# Altium PCB PMM_MSPC_22A.PcbDoc (part 2 of 5)
Units mm, origin at the board's own origin, x right, y up, seen from the top; angles counter-clockwise.
Board outline 86.91 x 61.9 mm, 4 copper layers (Top Layer, GroundPlane, MidLayer1, Bottom Layer); 159 components, 129 nets, 534 pads, 221 vias.
Unrouted connection lines stored in the file: 36.
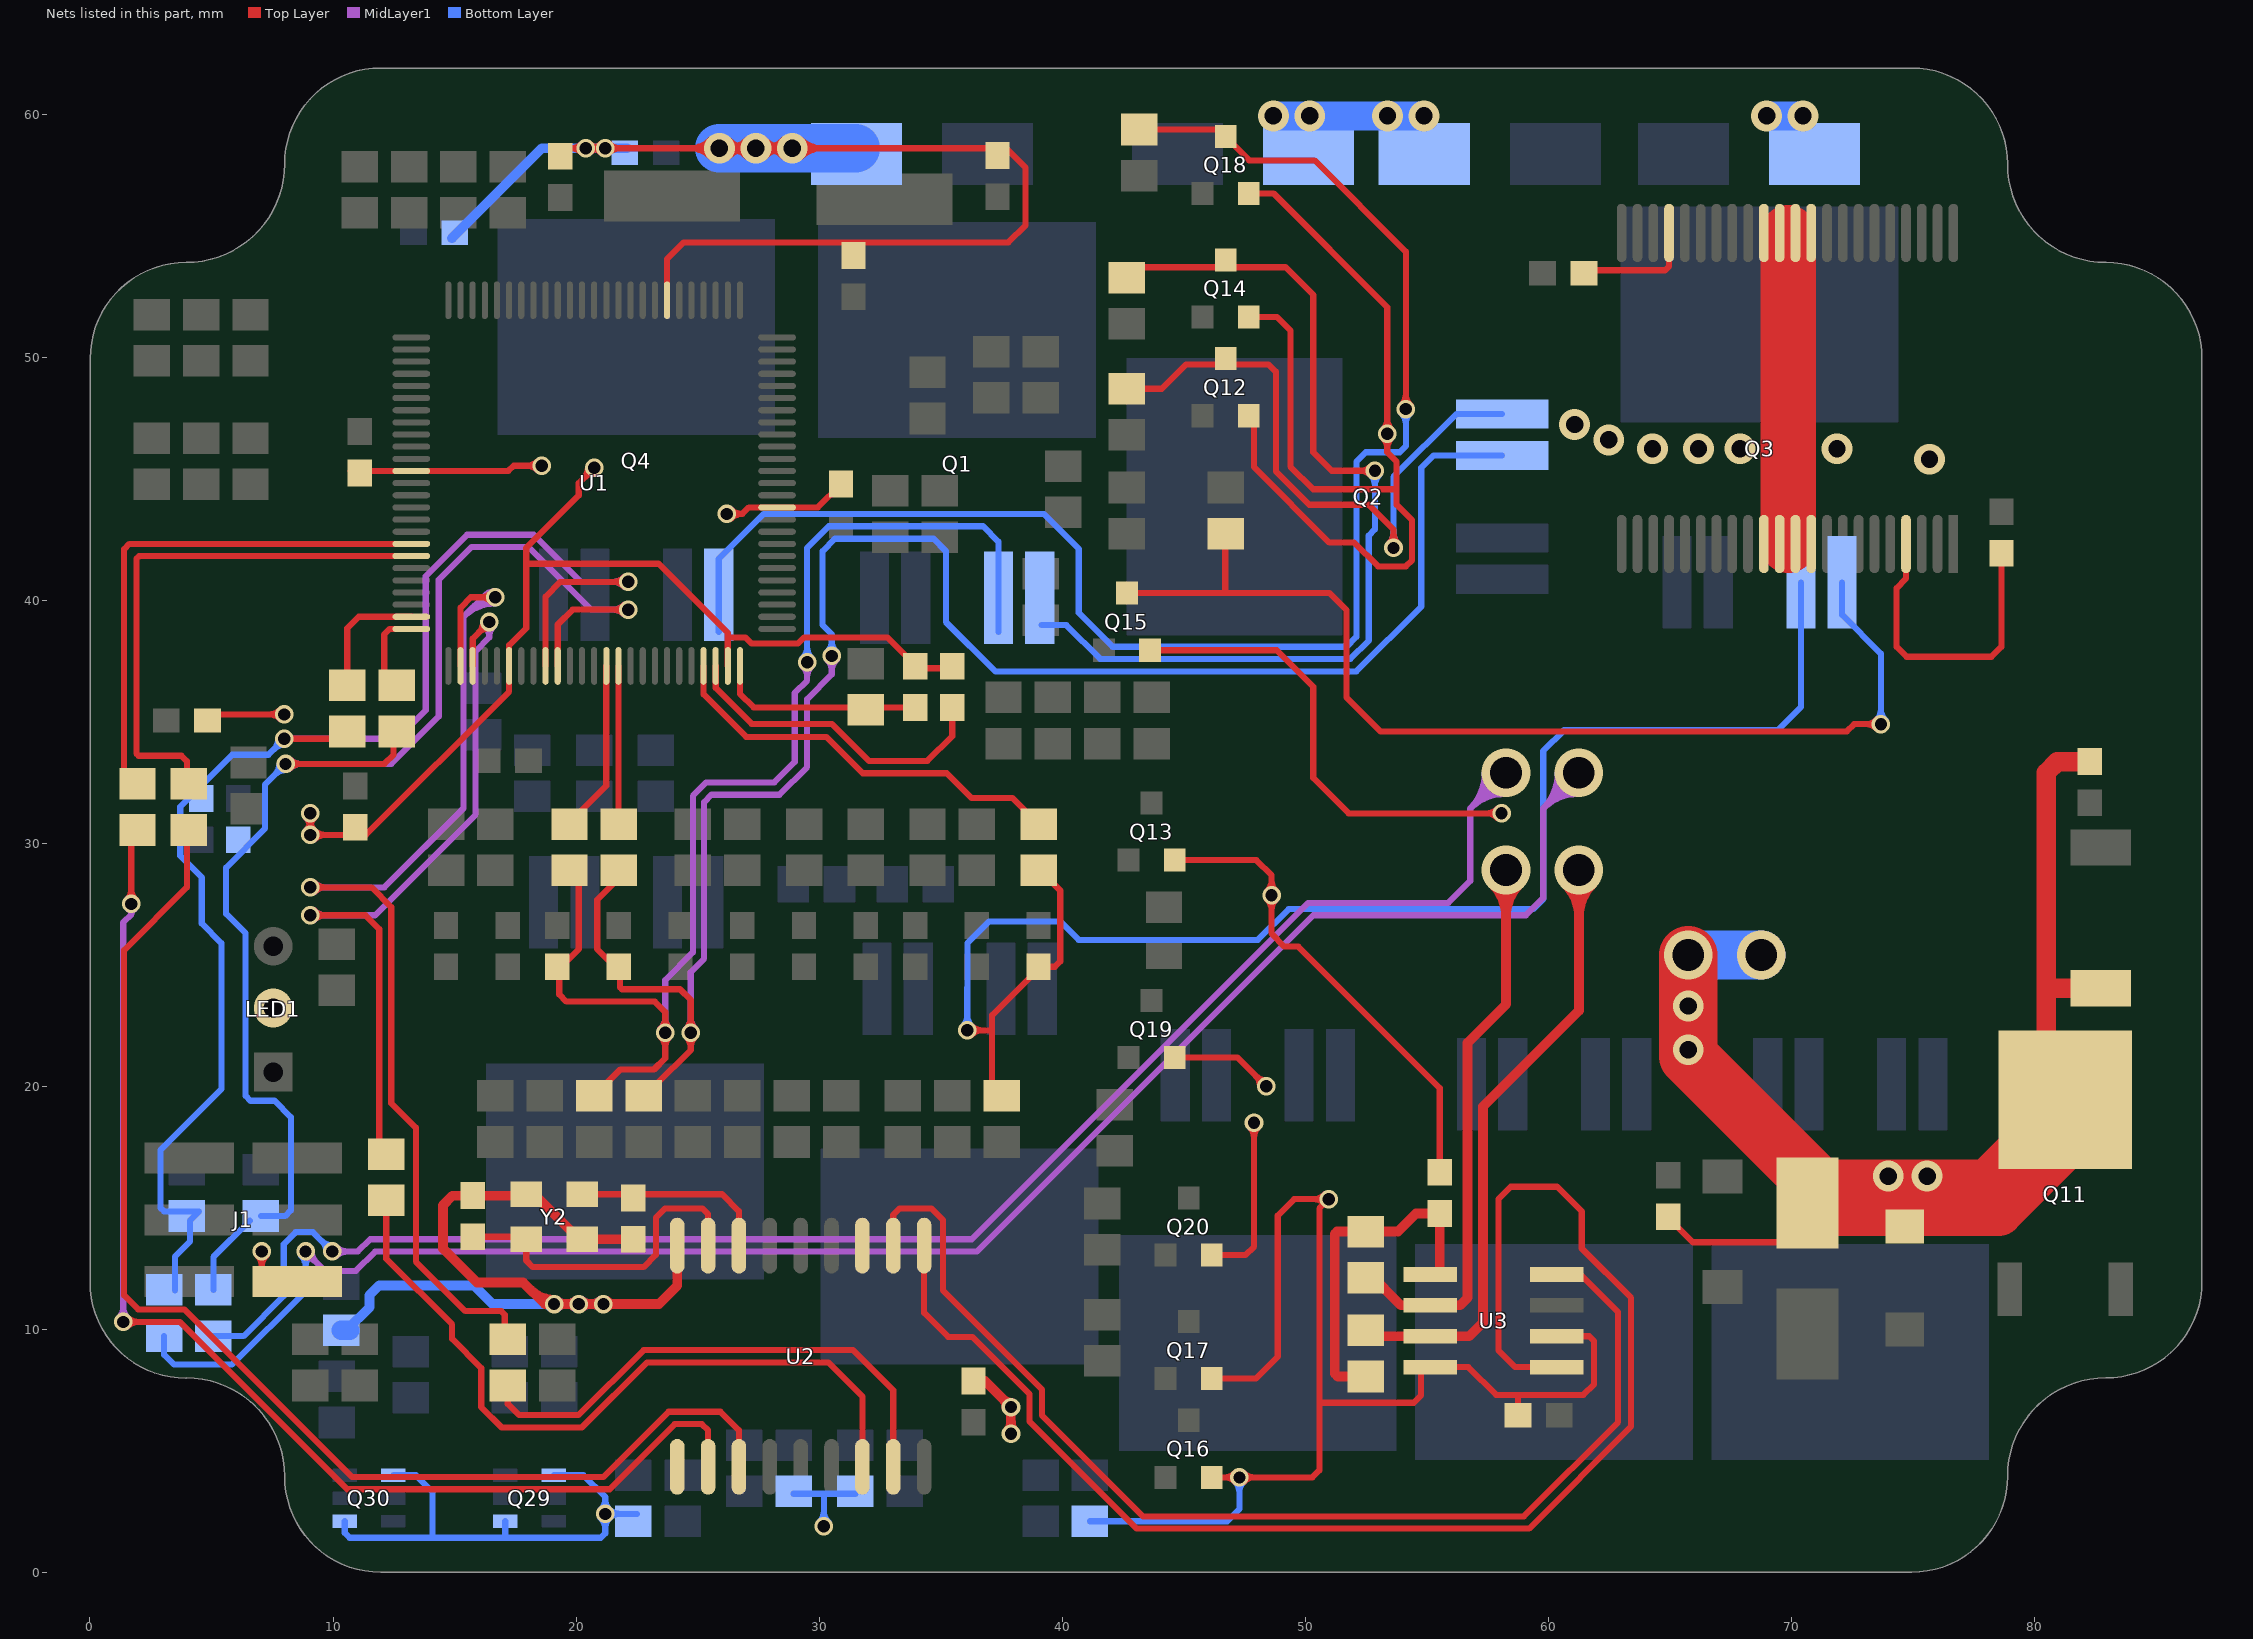
[diagram p4: the nets of this part, all layers, seen from the top]

## Via types
v1: diameter 0.762, hole 0.508, Top Layer to Bottom Layer, 138 vias
v2: diameter 2, hole 1.3, Top Layer to Bottom Layer, 26 vias
v3: diameter 1.27, hole 0.711, Top Layer to Bottom Layer, tented top, 23 vias
v4: diameter 0.762, hole 0.508, Top Layer to Bottom Layer, tented bottom, 21 vias
v5: diameter 1.27, hole 0.711, Top Layer to Bottom Layer, 7 vias
v6: diameter 0.762, hole 0.508, Top Layer to Bottom Layer, tented both sides, 5 vias
v7: diameter 2.5, hole 2.6, Top Layer to Bottom Layer, 1 vias

## Nets (pads, with @x,y where several pads share a name; then routed paths per layer and width w, separated by ;. In a path a pad name is that pad's centre, name@x,y a point inside that pad or via, vN(x,y) a via of type N, cw(c..) or ccw(c..) an arc to the next point about the centre after c; other vN are vias at no path point) (continued)
AN1: R64.2 | length 98.2
  MidLayer1 w0.254: v1(9.97,13.2) 11.028,13.2 11.532,13.704 36.285,13.704 50.128,27.547 55.897,27.547 56.8,28.45 56.8,31.43 v2(58.27,32.9) ; v1@10.15,13.02 cw(c10.583,12.587) 10.583,13.2 ; v1@10.15,13.02 cw(c10.583,12.587) 10.583,13.2 ; v1@10.15,13.02 cw(c10.583,12.587) 10.583,13.2 ; v1@10.15,13.02 cw(c10.583,12.587) 10.583,13.2 ; v1@10.15,13.02 cw(c10.583,12.587) 10.583,13.2 ; v1@10.15,13.38 ccw(c10.583,13.813) 10.583,13.2 ; v1@10.15,13.38 ccw(c10.583,13.813) 10.583,13.2 ; v1@10.15,13.38 ccw(c10.583,13.813) 10.583,13.2 ; v1@10.15,13.38 ccw(c10.583,13.813) 10.583,13.2 ; v1@10.15,13.38 ccw(c10.583,13.813) 10.583,13.2 ; 56.8,31.43 ccw(c55.359,32.871) v2@57.397,32.891 ; 56.8,31.43 cw(c58.241,29.989) v2@58.261,32.027 ; 56.8,31.43 ccw(c55.359,32.871) v2@57.397,32.891 ; 56.8,31.43 cw(c58.241,29.989) v2@58.261,32.027 ; 56.8,31.43 ccw(c55.359,32.871) v2@57.397,32.891 ; 56.8,31.43 cw(c58.241,29.989) v2@58.261,32.027 ; 56.8,31.43 ccw(c55.359,32.871) v2@57.397,32.891 ; 56.8,31.43 cw(c58.241,29.989) v2@58.261,32.027 ; 57.228,31.858 ccw(c56.206,32.88) v2@57.651,32.894 ; 57.228,31.858 cw(c58.25,30.836) v2@58.264,32.281 ; 57.228,31.858 ccw(c56.206,32.88) v2@57.651,32.894 ; 57.228,31.858 cw(c58.25,30.836) v2@58.264,32.281 ; 57.228,31.858 ccw(c56.206,32.88) v2@57.651,32.894 ; 57.228,31.858 cw(c58.25,30.836) v2@58.264,32.281 ; 57.228,31.858 ccw(c56.206,32.88) v2@57.651,32.894 ; 57.228,31.858 cw(c58.25,30.836) v2@58.264,32.281
  Bottom Layer w0.254: R64.2@5.08,9.718 6.318,9.718 7.97,11.37 7.97,13.5 8.47,14 9.17,14 v1(9.97,13.2) ; 9.536,13.634 ccw(c9.97,14.067) v1@9.97,13.454 ; 9.536,13.634 cw(c9.103,13.2) v1@9.716,13.2 ; 9.536,13.634 ccw(c9.97,14.067) v1@9.97,13.454 ; 9.536,13.634 cw(c9.103,13.2) v1@9.716,13.2 ; 9.536,13.634 ccw(c9.97,14.067) v1@9.97,13.454 ; 9.536,13.634 cw(c9.103,13.2) v1@9.716,13.2 ; 9.536,13.634 ccw(c9.97,14.067) v1@9.97,13.454 ; 9.536,13.634 cw(c9.103,13.2) v1@9.716,13.2 ; 9.536,13.634 ccw(c9.97,14.067) v1@9.97,13.454 ; 9.536,13.634 cw(c9.103,13.2) v1@9.716,13.2
AN1_bias: R75.1 U1.75 | length 3.5
  Top Layer w0.254: R75.1@12.111,36.31 12.111,38.596 12.334,38.819 U1.75@13.222,38.819
AN1_split: C29.2 R64.1 R67.2 R75.2 U1.85 | length 82.3
  Top Layer w0.254: v1(8.047,33.262) 12.111,33.262 12.492,33.643 R75.2@12.492,34.405 ; U1.85@19.247,37.294 19.247,39.001 19.858,39.612 v1(22.144,39.612) ; v1@8.227,33.082 cw(c8.66,32.649) 8.66,33.262 ; v1@8.227,33.082 cw(c8.66,32.649) 8.66,33.262 ; v1@8.227,33.082 cw(c8.66,32.649) 8.66,33.262 ; v1@8.227,33.082 cw(c8.66,32.649) 8.66,33.262 ; v1@8.227,33.082 cw(c8.66,32.649) 8.66,33.262 ; v1@8.227,33.442 ccw(c8.66,33.875) 8.66,33.262 ; v1@8.227,33.442 ccw(c8.66,33.875) 8.66,33.262 ; v1@8.227,33.442 ccw(c8.66,33.875) 8.66,33.262 ; v1@8.227,33.442 ccw(c8.66,33.875) 8.66,33.262 ; v1@8.227,33.442 ccw(c8.66,33.875) 8.66,33.262 ; 21.531,39.612 ccw(c21.531,40.225) v1@21.964,39.792 ; 21.531,39.612 cw(c21.531,38.999) v1@21.964,39.432 ; 21.531,39.612 ccw(c21.531,40.225) v1@21.964,39.792 ; 21.531,39.612 cw(c21.531,38.999) v1@21.964,39.432 ; 21.531,39.612 ccw(c21.531,40.225) v1@21.964,39.792 ; 21.531,39.612 cw(c21.531,38.999) v1@21.964,39.432 ; 21.531,39.612 ccw(c21.531,40.225) v1@21.964,39.792 ; 21.531,39.612 cw(c21.531,38.999) v1@21.964,39.432 ; 21.531,39.612 ccw(c21.531,40.225) v1@21.964,39.792 ; 21.531,39.612 cw(c21.531,38.999) v1@21.964,39.432
  MidLayer1 w0.254: v1(8.047,33.262) 12.397,33.262 14.354,35.219 14.354,40.839 15.699,42.184 18.048,42.184 20.62,39.612 v1(22.144,39.612) ; v1@8.227,33.082 cw(c8.66,32.649) 8.66,33.262 ; v1@8.227,33.082 cw(c8.66,32.649) 8.66,33.262 ; v1@8.227,33.082 cw(c8.66,32.649) 8.66,33.262 ; v1@8.227,33.082 cw(c8.66,32.649) 8.66,33.262 ; v1@8.227,33.082 cw(c8.66,32.649) 8.66,33.262 ; v1@8.227,33.442 ccw(c8.66,33.875) 8.66,33.262 ; v1@8.227,33.442 ccw(c8.66,33.875) 8.66,33.262 ; v1@8.227,33.442 ccw(c8.66,33.875) 8.66,33.262 ; v1@8.227,33.442 ccw(c8.66,33.875) 8.66,33.262 ; v1@8.227,33.442 ccw(c8.66,33.875) 8.66,33.262 ; 21.531,39.612 ccw(c21.531,40.225) v1@21.964,39.792 ; 21.531,39.612 cw(c21.531,38.999) v1@21.964,39.432 ; 21.531,39.612 ccw(c21.531,40.225) v1@21.964,39.792 ; 21.531,39.612 cw(c21.531,38.999) v1@21.964,39.432 ; 21.531,39.612 ccw(c21.531,40.225) v1@21.964,39.792 ; 21.531,39.612 cw(c21.531,38.999) v1@21.964,39.432 ; 21.531,39.612 ccw(c21.531,40.225) v1@21.964,39.792 ; 21.531,39.612 cw(c21.531,38.999) v1@21.964,39.432 ; 21.531,39.612 ccw(c21.531,40.225) v1@21.964,39.792 ; 21.531,39.612 cw(c21.531,38.999) v1@21.964,39.432
  Bottom Layer w0.254: R64.1@5.08,11.618 5.08,12.973 R67.2@6.573,14.466 ; R67.2@7.031,14.659 8.029,14.659 8.27,14.9 8.27,18.726 7.596,19.4 6.6,19.4 6.4,19.6 6.4,26.3 5.6,27.1 5.6,29 7.2,30.6 7.2,32.415 v1(8.047,33.262) ; 7.613,32.828 ccw(c7.18,33.262) v1@7.793,33.262 ; 7.613,32.828 cw(c8.047,32.395) v1@8.047,33.008 ; 7.613,32.828 ccw(c7.18,33.262) v1@7.793,33.262 ; 7.613,32.828 cw(c8.047,32.395) v1@8.047,33.008 ; 7.613,32.828 ccw(c7.18,33.262) v1@7.793,33.262 ; 7.613,32.828 cw(c8.047,32.395) v1@8.047,33.008 ; 7.613,32.828 ccw(c7.18,33.262) v1@7.793,33.262 ; 7.613,32.828 cw(c8.047,32.395) v1@8.047,33.008 ; 7.613,32.828 ccw(c7.18,33.262) v1@7.793,33.262 ; 7.613,32.828 cw(c8.047,32.395) v1@8.047,33.008
AN2: R65.2 | length 104.8
  MidLayer1 w0.254: v1(8.87,13.2) 9.67,12.4 10.934,12.4 11.73,13.196 36.495,13.196 50.338,27.039 59.089,27.039 59.8,27.75 59.8,31.43 v2(61.27,32.9) ; v1@8.87,12.946 cw(c8.87,12.333) 9.304,12.766 ; v1@8.87,12.946 cw(c8.87,12.333) 9.304,12.766 ; v1@8.87,12.946 cw(c8.87,12.333) 9.304,12.766 ; v1@8.87,12.946 cw(c8.87,12.333) 9.304,12.766 ; v1@8.87,12.946 cw(c8.87,12.333) 9.304,12.766 ; v1@9.124,13.2 ccw(c9.737,13.2) 9.304,12.766 ; v1@9.124,13.2 ccw(c9.737,13.2) 9.304,12.766 ; v1@9.124,13.2 ccw(c9.737,13.2) 9.304,12.766 ; v1@9.124,13.2 ccw(c9.737,13.2) 9.304,12.766 ; v1@9.124,13.2 ccw(c9.737,13.2) 9.304,12.766 ; 59.8,31.43 ccw(c58.359,32.871) v2@60.397,32.891 ; 59.8,31.43 cw(c61.241,29.989) v2@61.261,32.027 ; 59.8,31.43 ccw(c58.359,32.871) v2@60.397,32.891 ; 59.8,31.43 cw(c61.241,29.989) v2@61.261,32.027 ; 59.8,31.43 ccw(c58.359,32.871) v2@60.397,32.891 ; 59.8,31.43 cw(c61.241,29.989) v2@61.261,32.027 ; 59.8,31.43 ccw(c58.359,32.871) v2@60.397,32.891 ; 59.8,31.43 cw(c61.241,29.989) v2@61.261,32.027 ; 60.228,31.858 ccw(c59.206,32.88) v2@60.651,32.894 ; 60.228,31.858 cw(c61.25,30.836) v2@61.264,32.281 ; 60.228,31.858 ccw(c59.206,32.88) v2@60.651,32.894 ; 60.228,31.858 cw(c61.25,30.836) v2@61.264,32.281 ; 60.228,31.858 ccw(c59.206,32.88) v2@60.651,32.894 ; 60.228,31.858 cw(c61.25,30.836) v2@61.264,32.281 ; 60.228,31.858 ccw(c59.206,32.88) v2@60.651,32.894 ; 60.228,31.858 cw(c61.25,30.836) v2@61.264,32.281
  Bottom Layer w0.254: R65.2@3.048,9.718 3.048,8.952 3.45,8.55 5.85,8.55 8.87,11.57 v1(8.87,13.2) ; v1@8.69,13.02 cw(c8.257,12.587) 8.87,12.587 ; v1@8.69,13.02 cw(c8.257,12.587) 8.87,12.587 ; v1@8.69,13.02 cw(c8.257,12.587) 8.87,12.587 ; v1@8.69,13.02 cw(c8.257,12.587) 8.87,12.587 ; v1@8.69,13.02 cw(c8.257,12.587) 8.87,12.587 ; 8.87,12.587 cw(c9.483,12.587) v1@9.05,13.02 ; 8.87,12.587 cw(c9.483,12.587) v1@9.05,13.02 ; 8.87,12.587 cw(c9.483,12.587) v1@9.05,13.02 ; 8.87,12.587 cw(c9.483,12.587) v1@9.05,13.02 ; 8.87,12.587 cw(c9.483,12.587) v1@9.05,13.02
AN2_bias: R76.1 U1.74 | length 5.2
  Top Layer w0.254: R76.1@10.587,36.498 10.587,38.85 11.056,39.319 U1.74@13.222,39.319
AN2_split: C30.2 R65.1 R66.2 R76.2 U1.84 | length 70.1
  Top Layer w0.254: v1(8,34.3) R76.2@10.3,34.3 ; U1.84@18.747,37.294 18.747,40.152 19.35,40.755 v1(22.144,40.755) ; 21.531,40.755 ccw(c21.531,41.368) v1@21.964,40.935 ; 21.531,40.755 cw(c21.531,40.142) v1@21.964,40.575 ; 21.531,40.755 ccw(c21.531,41.368) v1@21.964,40.935 ; 21.531,40.755 cw(c21.531,40.142) v1@21.964,40.575 ; 21.531,40.755 ccw(c21.531,41.368) v1@21.964,40.935 ; 21.531,40.755 cw(c21.531,40.142) v1@21.964,40.575 ; 21.531,40.755 ccw(c21.531,41.368) v1@21.964,40.935 ; 21.531,40.755 cw(c21.531,40.142) v1@21.964,40.575 ; 21.531,40.755 ccw(c21.531,41.368) v1@21.964,40.935 ; 21.531,40.755 cw(c21.531,40.142) v1@21.964,40.575
  MidLayer1 w0.254: v1(8,34.3) 12.641,34.3 13.815,35.474 13.815,40.989 15.518,42.692 18.259,42.692 20.195,40.755 v1(22.144,40.755) ; 21.531,40.755 ccw(c21.531,41.368) v1@21.964,40.935 ; 21.531,40.755 cw(c21.531,40.142) v1@21.964,40.575 ; 21.531,40.755 ccw(c21.531,41.368) v1@21.964,40.935 ; 21.531,40.755 cw(c21.531,40.142) v1@21.964,40.575 ; 21.531,40.755 ccw(c21.531,41.368) v1@21.964,40.935 ; 21.531,40.755 cw(c21.531,40.142) v1@21.964,40.575 ; 21.531,40.755 ccw(c21.531,41.368) v1@21.964,40.935 ; 21.531,40.755 cw(c21.531,40.142) v1@21.964,40.575 ; 21.531,40.755 ccw(c21.531,41.368) v1@21.964,40.935 ; 21.531,40.755 cw(c21.531,40.142) v1@21.964,40.575
  Bottom Layer w0.254: R65.1@3.5,11.6 3.5,13 4.11,13.61 4.11,14.466 4.491,14.847 3.053,14.847 2.9,15 2.9,17.374 5.411,19.885 5.411,25.889 4.6,26.7 4.6,28.596 3.711,29.485 3.711,31.5 5.854,33.643 7.343,33.643 v1(8,34.3) ; v1@7.746,34.3 cw(c7.133,34.3) 7.566,33.866 cw(c8,33.433) v1@8,34.046
Aref: C23.2 U1.98 | length 13.5
  Top Layer w0.254: U1.98@25.747,37.294 25.747,36.39 27.224,34.913 30.526,34.913 32.05,33.389 34.463,33.389 35.479,34.405 C23.2@35.479,35.587
AVCC: C24.2 L1.2 U1.100 | length 8.6
  Top Layer w0.254: U1.100@26.747,37.294 26.747,36.152 27.312,35.587 C24.2@33.955,35.587
CAN_CLK: U2.3
CAN_HI: R11.1 U3.7 | length 37.6
  Top Layer w0.4: R11.1@52.37,9.713 56.761,9.713 57.323,10.275 57.323,19.165 61.27,23.112 v2(61.27,28.9) ; v2@60.704,28.334 cw(c59.339,26.969) 61.27,26.969 ; v2@60.704,28.334 cw(c59.339,26.969) 61.27,26.969 ; v2@60.704,28.334 cw(c59.339,26.969) 61.27,26.969 ; v2@60.704,28.334 cw(c59.339,26.969) 61.27,26.969 ; 61.27,26.969 cw(c63.201,26.969) v2@61.836,28.334 ; 61.27,26.969 cw(c63.201,26.969) v2@61.836,28.334 ; 61.27,26.969 cw(c63.201,26.969) v2@61.836,28.334 ; 61.27,26.969 cw(c63.201,26.969) v2@61.836,28.334
CAN_INT: R31.1 R31.2 U1.69 U2.12 | length 74.1
  Top Layer w0.254: R31.2@3.986,30.546 3.986,28.186 1.4,25.6 1.4,11.4 1.987,10.813 3.887,10.813 10.775,3.925 21.133,3.925 23.812,6.604 25.942,6.604 26.704,5.842 U2.12@26.704,4.34 ; R31.1@3.986,32.446 3.986,33.376 3.762,33.6 2,33.6 1.911,33.689 1.911,41.711 2.019,41.819 U1.69@13.222,41.819
CAN_LO: R10.2 U3.6 | length 35.1
  Top Layer w0.4: R10.2@52.624,12.307 53.948,10.983 56.38,10.983 56.688,11.291 56.688,21.788 58.27,23.37 v2(58.27,28.9) ; v2@57.704,28.334 cw(c56.339,26.969) 58.27,26.969 ; v2@57.704,28.334 cw(c56.339,26.969) 58.27,26.969 ; v2@57.704,28.334 cw(c56.339,26.969) 58.27,26.969 ; v2@57.704,28.334 cw(c56.339,26.969) 58.27,26.969 ; 58.27,26.969 cw(c60.201,26.969) v2@58.836,28.334 ; 58.27,26.969 cw(c60.201,26.969) v2@58.836,28.334 ; 58.27,26.969 cw(c60.201,26.969) v2@58.836,28.334 ; 58.27,26.969 cw(c60.201,26.969) v2@58.836,28.334
CAN_RST: R36.1 R36.2 U1.77 U2.17 | length 106.2
  Top Layer w0.254: v4(9.063,28.182) 11.588,28.182 12.4,27.37 12.4,19.3 13.411,18.289 13.411,12.785 15.446,10.75 16.92,10.75 17.07,10.6 R36.1@17.07,9.4 ; U1.77@15.247,37.294 15.247,39.7 15.667,40.12 v1(16.683,40.12) ; R36.2@17.194,7.686 17.194,6.926 17.655,6.465 20.1,6.465 22.779,9.144 31.403,9.144 33.054,7.493 U2.17@33.054,4.34 ; v4@9.243,28.002 cw(c9.676,27.569) 9.676,28.182 ; v4@9.243,28.002 cw(c9.676,27.569) 9.676,28.182 ; v4@9.243,28.002 cw(c9.676,27.569) 9.676,28.182 ; v4@9.243,28.002 cw(c9.676,27.569) 9.676,28.182 ; v4@9.243,28.002 cw(c9.676,27.569) 9.676,28.182 ; v4@9.243,28.362 ccw(c9.676,28.795) 9.676,28.182 ; v4@9.243,28.362 ccw(c9.676,28.795) 9.676,28.182 ; v4@9.243,28.362 ccw(c9.676,28.795) 9.676,28.182 ; v4@9.243,28.362 ccw(c9.676,28.795) 9.676,28.182 ; v4@9.243,28.362 ccw(c9.676,28.795) 9.676,28.182 ; 16.07,40.12 ccw(c16.07,40.733) v1@16.503,40.3 ; 16.07,40.12 cw(c16.07,39.507) v1@16.503,39.94 ; 16.07,40.12 ccw(c16.07,40.733) v1@16.503,40.3 ; 16.07,40.12 cw(c16.07,39.507) v1@16.503,39.94 ; 16.07,40.12 ccw(c16.07,40.733) v1@16.503,40.3 ; 16.07,40.12 cw(c16.07,39.507) v1@16.503,39.94 ; 16.07,40.12 ccw(c16.07,40.733) v1@16.503,40.3 ; 16.07,40.12 cw(c16.07,39.507) v1@16.503,39.94 ; 16.07,40.12 ccw(c16.07,40.733) v1@16.503,40.3 ; 16.07,40.12 cw(c16.07,39.507) v1@16.503,39.94
  MidLayer1 w0.254: v4(9.063,28.182) 12.111,28.182 15.37,31.441 15.37,39.315 16.175,40.12 ; v4@9.243,28.002 cw(c9.676,27.569) 9.676,28.182 ; v4@9.243,28.002 cw(c9.676,27.569) 9.676,28.182 ; v4@9.243,28.002 cw(c9.676,27.569) 9.676,28.182 ; v4@9.243,28.002 cw(c9.676,27.569) 9.676,28.182 ; v4@9.243,28.002 cw(c9.676,27.569) 9.676,28.182 ; v4@9.243,28.362 ccw(c9.676,28.795) 9.676,28.182 ; v4@9.243,28.362 ccw(c9.676,28.795) 9.676,28.182 ; v4@9.243,28.362 ccw(c9.676,28.795) 9.676,28.182 ; v4@9.243,28.362 ccw(c9.676,28.795) 9.676,28.182 ; v4@9.243,28.362 ccw(c9.676,28.795) 9.676,28.182 ; 15.382,39.327 cw(c16.683,38.026) v1@16.683,39.866 ; 15.382,39.327 cw(c16.683,38.026) v1@16.683,39.866 ; 15.382,39.327 cw(c16.683,38.026) v1@16.683,39.866 ; 15.382,39.327 cw(c16.683,38.026) v1@16.683,39.866 ; 15.382,39.327 cw(c16.683,38.026) v1@16.683,39.866 ; 15.816,39.761 cw(c16.683,38.894) v1(16.683,40.12) ; 15.816,39.761 cw(c16.683,38.894) v1(16.683,40.12) ; 15.816,39.761 cw(c16.683,38.894) v1(16.683,40.12) ; 15.816,39.761 cw(c16.683,38.894) v1(16.683,40.12) ; 15.816,39.761 cw(c16.683,38.894) v1(16.683,40.12) ; 15.921,39.866 cw(c16.256,39.531) v1@16.534,39.914 ; 15.921,39.866 cw(c16.256,39.531) v1@16.534,39.914 ; 15.921,39.866 cw(c16.256,39.531) v1@16.534,39.914 ; 15.921,39.866 cw(c16.256,39.531) v1@16.534,39.914 ; 15.921,39.866 cw(c16.256,39.531) v1@16.534,39.914 ; 16.131,40.076 cw(c16.433,39.775) v1(16.683,40.12) ; 16.131,40.076 cw(c16.433,39.775) v1(16.683,40.12) ; 16.131,40.076 cw(c16.433,39.775) v1(16.683,40.12) ; 16.131,40.076 cw(c16.433,39.775) v1(16.683,40.12) ; 16.131,40.076 cw(c16.433,39.775) v1(16.683,40.12) ; 16.175,40.12 ccw(c16.175,40.501) v1@16.48,40.272 ; 16.175,40.12 cw(c16.175,39.739) v1@16.48,39.968 ; 16.175,40.12 ccw(c16.175,40.501) v1@16.48,40.272 ; 16.175,40.12 cw(c16.175,39.739) v1@16.48,39.968 ; 16.175,40.12 ccw(c16.175,40.501) v1@16.48,40.272 ; 16.175,40.12 cw(c16.175,39.739) v1@16.48,39.968 ; 16.175,40.12 ccw(c16.175,40.501) v1@16.48,40.272 ; 16.175,40.12 cw(c16.175,39.739) v1@16.48,39.968 ; 16.175,40.12 ccw(c16.175,40.501) v1@16.48,40.272 ; 16.175,40.12 cw(c16.175,39.739) v1@16.48,39.968 ; 16.175,40.12 v1(16.683,40.12) ; 16.249,40.194 cw(c16.683,39.761) v1@16.683,40.374 ; 16.249,40.194 cw(c16.683,39.761) v1@16.683,40.374 ; 16.249,40.194 cw(c16.683,39.761) v1@16.683,40.374 ; 16.249,40.194 cw(c16.683,39.761) v1@16.683,40.374 ; 16.249,40.194 cw(c16.683,39.761) v1@16.683,40.374
CAN_RX: U2.2 U3.4 | length 47.8
  Top Layer w0.254: U2.2@33.054,13.716 33.054,14.708 33.32,14.974 34.626,14.974 35.1,14.5 35.1,11.6 39.18,7.52 39.18,6.447 43.327,2.3 59,2.3 62.879,6.179 62.879,10.704 61.282,12.301 U3.4@60.409,12.301
CAN_RX0buff: R30.1 R30.2 U1.68 U2.11 | length 74.9
  Top Layer w0.254: v1(1.37,10.3) 3.7,10.3 10.583,3.417 21.387,3.417 24.066,6.096 25.18,6.096 25.434,5.842 U2.11@25.434,4.34 ; R30.1@1.471,32.41 1.4,32.482 1.4,42.1 1.619,42.319 U1.68@13.222,42.319 ; v1@1.52,27.68 ccw(c1.087,28.113) 1.7,28.113 ccw(c2.313,28.113) v1@1.88,27.68 ; v1@1.55,10.12 cw(c1.983,9.687) 1.983,10.3 cw(c1.983,10.913) v1@1.55,10.48 ; v1(1.7,27.5) R30.2@1.7,30.4
  MidLayer1 w0.254: v1@1.19,10.48 ccw(c0.757,10.913) 1.37,10.913 ccw(c1.983,10.913) v1@1.55,10.48 ; v1(1.37,10.3) 1.37,26.744 1.711,27.085 ; v1@1.593,27.27 cw(c1.507,27.085) 1.711,27.085 ; v1(1.7,27.5) 1.711,27.489 1.711,27.085 ; v1@1.824,27.279 ccw(c1.933,27.085) 1.711,27.085
CAN_RX1buff: U2.10
CAN_select: R35.1 R35.2 U1.78 U2.16 | length 81
  Top Layer w0.254: v4(9.063,27.039) 11.331,27.039 11.9,26.47 R35.1@11.9,17.3 ; R35.2@12.192,15.306 12.192,12.904 14.9,10.196 14.9,9.6 16.1,8.4 16.1,6.8 16.943,5.957 20.244,5.957 22.923,8.636 30.387,8.636 31.784,7.239 U2.16@31.784,4.34 ; U1.78@15.747,37.294 15.747,38.422 v1(16.429,39.104) ; v4@9.243,26.859 cw(c9.676,26.426) 9.676,27.039 ; v4@9.243,26.859 cw(c9.676,26.426) 9.676,27.039 ; v4@9.243,26.859 cw(c9.676,26.426) 9.676,27.039 ; v4@9.243,26.859 cw(c9.676,26.426) 9.676,27.039 ; v4@9.243,26.859 cw(c9.676,26.426) 9.676,27.039 ; v4@9.243,27.219 ccw(c9.676,27.652) 9.676,27.039 ; v4@9.243,27.219 ccw(c9.676,27.652) 9.676,27.039 ; v4@9.243,27.219 ccw(c9.676,27.652) 9.676,27.039 ; v4@9.243,27.219 ccw(c9.676,27.652) 9.676,27.039 ; v4@9.243,27.219 ccw(c9.676,27.652) 9.676,27.039 ; 15.995,38.67 ccw(c15.562,39.104) v1@16.175,39.104 ; 15.995,38.67 cw(c16.429,38.237) v1@16.429,38.85 ; 15.995,38.67 ccw(c15.562,39.104) v1@16.175,39.104 ; 15.995,38.67 cw(c16.429,38.237) v1@16.429,38.85 ; 15.995,38.67 ccw(c15.562,39.104) v1@16.175,39.104 ; 15.995,38.67 cw(c16.429,38.237) v1@16.429,38.85 ; 15.995,38.67 ccw(c15.562,39.104) v1@16.175,39.104 ; 15.995,38.67 cw(c16.429,38.237) v1@16.429,38.85 ; 15.995,38.67 ccw(c15.562,39.104) v1@16.175,39.104 ; 15.995,38.67 cw(c16.429,38.237) v1@16.429,38.85
  MidLayer1 w0.254: v4(9.063,27.039) 11.73,27.039 15.87,31.179 15.87,37.91 16.429,38.469 v1(16.429,39.104) ; v4@9.243,26.859 cw(c9.676,26.426) 9.676,27.039 ; v4@9.243,26.859 cw(c9.676,26.426) 9.676,27.039 ; v4@9.243,26.859 cw(c9.676,26.426) 9.676,27.039 ; v4@9.243,26.859 cw(c9.676,26.426) 9.676,27.039 ; v4@9.243,26.859 cw(c9.676,26.426) 9.676,27.039 ; v4@9.243,27.219 ccw(c9.676,27.652) 9.676,27.039 ; v4@9.243,27.219 ccw(c9.676,27.652) 9.676,27.039 ; v4@9.243,27.219 ccw(c9.676,27.652) 9.676,27.039 ; v4@9.243,27.219 ccw(c9.676,27.652) 9.676,27.039 ; v4@9.243,27.219 ccw(c9.676,27.652) 9.676,27.039 ; v1@16.249,38.924 cw(c15.816,38.491) 16.429,38.491 ; v1@16.249,38.924 cw(c15.816,38.491) 16.429,38.491 ; v1@16.249,38.924 cw(c15.816,38.491) 16.429,38.491 ; v1@16.249,38.924 cw(c15.816,38.491) 16.429,38.491 ; v1@16.249,38.924 cw(c15.816,38.491) 16.429,38.491 ; 16.429,38.491 cw(c17.042,38.491) v1@16.609,38.924 ; 16.429,38.491 cw(c17.042,38.491) v1@16.609,38.924 ; 16.429,38.491 cw(c17.042,38.491) v1@16.609,38.924 ; 16.429,38.491 cw(c17.042,38.491) v1@16.609,38.924 ; 16.429,38.491 cw(c17.042,38.491) v1@16.609,38.924
CAN_SPLIT: C9.2 R10.1 R11.2 U3.5 | length 14.3
  Top Layer w0.4: R11.2@52.497,8.055 51.345,8.055 51.227,8.173 51.227,13.927 51.319,14.019 53.828,14.019 54.568,14.759 C9.2@55.545,14.759 U3.5@55.545,12.18
CAN_TX: U2.1 U3.1 | length 60.6
  Top Layer w0.254: U2.1@34.324,13.44 34.324,10.676 35.315,9.685 36.315,9.685 38.66,7.34 38.66,6.205 43.065,1.8 59.218,1.8 63.419,6.001 63.419,11.291 61.387,13.323 61.387,14.847 60.371,15.863 58.466,15.863 57.958,15.355 57.958,9.132 58.647,8.443 U3.1@60.362,8.443
CAN_XT1: C50.1 U2.8 Y2.3 | length 14.1
  Top Layer w0.254: C50.1@15.753,13.804 Y2.3@17.604,13.804 ; Y2.3@17.459,13.704 Y2.3@17.953,13.704 17.953,12.829 18.221,12.561 22.779,12.561 23.287,13.069 23.287,14.593 23.668,14.974 25.192,14.974 25.434,14.732 U2.8@25.434,13.44
CAN_XT2: C51.2 U2.7 Y2.1 | length 8.2
  Top Layer w0.254: Y2.1@20.253,15.554 26.009,15.554 26.704,14.859 U2.7@26.704,13.44
CCP12: C88.1 pad.26 | length 5.3
  Top Layer w0.254: C88.1@61.133,53.582 64.816,53.582 64.98,53.746 pad.26@64.98,55.114
CCP34: C89.2 pad.4 | length 12.9
  Top Layer w0.254: pad.4@74.73,42.314 74.73,40.89 74.341,40.501 74.341,38.088 74.754,37.675 78.246,37.675 78.659,38.088 C89.2@78.659,41.937
GND: C1.2 C2.2 C3.1 C4.2 C5.1 C6.2 C7.2 C8.1 C9.1 C10.2 C23.1 C24.1 C25.1 C26.1 C27.1 C28.1 C50.2 C51.1 C87.1 C90.1 C91.2 C92.2 C93.2 C94.1 J1.6 LED1.2 pad.10 pad.11 pad.12 pad.13 pad.32 pad.33 pad.34 pad.35 Q11.4 Q12.2 Q13.2 Q14.2 Q15.2 Q16.2 Q17.2 Q18.2 Q19.2 Q20.2 Q29.1 Q29.4 Q30.1 Q30.4 R74.2 R77.2 R80.2 R81.2 R84.2 U1.11 U1.32 U1.62 U1.81 U1.99 U2.9 U3.2 U3.8 Y2.2 Y2.4 ZD1.1 | length 518
  Top Layer w0.254: C25.1@5.126,35.294 v1(8,35.3) ; v1@6.89,13.07 cw(c6.457,12.637) 7.07,12.637 cw(c7.683,12.637) v1@7.25,13.07 ; J1.6@7.07,12 v1(7.07,13.2) ; v1@7.82,35.479 cw(c7.386,35.912) 7.387,35.299 cw(c7.388,34.686) v1@7.821,35.12 ; v4(9.063,31.23) v4(9.063,30.341) 11.349,30.341 17.247,36.239 17.247,38.144 17.953,38.85 17.953,42.152 20.112,44.311 20.112,44.819 v1(20.747,45.454) ; C27.1@10.714,45.319 17.219,45.319 17.435,45.535 v4(18.588,45.535) ; 17.953,41.5 23.4,41.5 26.247,38.653 U1.99@26.247,37.294 ; v4@18.408,45.355 ccw(c17.975,44.922) 17.975,45.535 ccw(c17.975,46.148) v4@18.408,45.715 ; C90.1@19.351,58.2 19.751,58.6 37.7,58.6 38.5,57.8 38.5,55.43 37.795,54.725 24.43,54.725 23.747,54.042 U1.32@23.747,52.344 ; v1@20.22,58.42 ccw(c19.787,57.987) 19.787,58.6 ccw(c19.787,59.213) v1@20.22,58.78 ; v1@20.58,58.42 cw(c21.013,57.987) 21.013,58.6 cw(c21.013,59.213) v1@20.58,58.78 ; v1@21.02,58.42 ccw(c20.587,57.987) 20.587,58.6 ccw(c20.587,59.213) v1@21.02,58.78 ; v1@21.38,58.42 cw(c21.813,57.987) 21.813,58.6 cw(c21.813,59.213) v1@21.38,58.78 ; v3@25.541,58.241 ccw(c24.674,57.374) 24.674,58.6 ccw(c24.674,59.826) v3@25.541,58.959 ; v1(26.208,43.549) 26.843,43.549 27.113,43.819 29.946,43.819 C26.1@30.907,44.78 ; v3@26.259,58.241 cw(c27.126,57.374) 27.126,58.6 cw(c27.126,59.826) v3@26.259,58.959 ; 26.3,38.469 26.97,38.469 27.224,38.215 29.129,38.215 29.383,38.469 32.812,38.469 34.082,37.199 C23.1@35.606,37.199 ; v3@27.041,58.241 ccw(c26.174,57.374) 26.174,58.6 ccw(c26.174,59.826) v3@27.041,58.959 ; v3@27.759,58.241 cw(c28.626,57.374) 28.626,58.6 cw(c28.626,59.826) v3@27.759,58.959 ; v3@28.541,58.241 ccw(c27.674,57.374) 27.674,58.6 ccw(c27.674,59.826) v3@28.541,58.959 ; v3@29.259,58.241 cw(c30.126,57.374) 30.126,58.6 cw(c30.126,59.826) v3@29.259,58.959 ; Q15.2@43.622,37.941 48.834,37.941 50.338,36.437 50.338,32.691 51.798,31.23 v6(58.085,31.23) ; Q19.2@44.638,21.177 47.223,21.177 v1(48.4,20) ; Q13.2@44.638,29.305 47.995,29.305 48.621,28.679 48.621,26.279 49.151,25.749 49.723,25.749 55.545,19.927 C9.1@55.545,16.459 ; Q16.2@46.162,3.905 50.305,3.905 50.592,4.192 50.592,14.974 v1(50.973,15.355) 49.555,15.355 48.875,14.675 48.875,8.875 47.969,7.969 Q17.2@46.162,7.969 ; Q20.2@46.162,13.049 47.549,13.049 47.9,13.4 v1(47.9,18.5) ; 46.675,3.905 cw(c46.675,3.275) v1@47.12,3.72 ; 46.699,3.905 ccw(c46.699,4.501) v1@47.12,4.08 ; v1@47.48,3.72 cw(c47.925,3.275) 47.925,3.905 ; v1@47.48,4.08 ccw(c47.901,4.501) 47.901,3.905 ; Q14.2@47.686,51.657 48.843,51.657 49.4,51.1 49.4,45.5 50.335,44.565 53.767,44.565 ; Q18.2@47.686,56.737 48.707,56.737 53.385,52.059 53.385,46.09 53.767,45.708 53.767,43.93 54.402,43.295 54.402,41.644 54.148,41.39 53.005,41.39 52.021,42.374 51.003,42.374 47.9,45.477 Q12.2@47.9,47.7 ; 50.592,6.973 54.473,6.973 54.776,7.276 U3.8@54.776,8.5 ; U3.8@55.143,8.443 56.717,8.443 57.862,7.298 61.458,7.298 61.895,7.735 61.895,9.513 61.695,9.713 U3.2@61.159,9.713 ; C87.1@58.759,6.465 58.759,7.259 ; C3.1@65.07,14.466 65.959,13.577 C2.2@70.658,13.577 ; v1@6.89,13.02 cw(c6.457,12.587) J1.6@7.07,12.587 ; v1@6.89,13.02 cw(c6.457,12.587) J1.6@7.07,12.587 ; v1@6.89,13.02 cw(c6.457,12.587) J1.6@7.07,12.587 ; v1@6.89,13.02 cw(c6.457,12.587) J1.6@7.07,12.587 ; J1.6@7.07,12.587 cw(c7.683,12.587) v1@7.25,13.02 ; J1.6@7.07,12.587 cw(c7.683,12.587) v1@7.25,13.02 ; J1.6@7.07,12.587 cw(c7.683,12.587) v1@7.25,13.02 ; J1.6@7.07,12.587 cw(c7.683,12.587) v1@7.25,13.02 ; v4@8.883,30.521 ccw(c8.45,30.954) v4@9.063,30.954 ; v4@8.883,30.521 ccw(c8.45,30.954) v4@9.063,30.954 ; v4@8.883,30.521 ccw(c8.45,30.954) v4@9.063,30.954 ; v4@8.883,30.521 ccw(c8.45,30.954) v4@9.063,30.954 ; v4@8.883,30.521 ccw(c8.45,30.954) v4@9.063,30.954 ; v4@8.883,31.05 cw(c8.45,30.617) v4@9.063,30.617 ; v4@8.883,31.05 cw(c8.45,30.617) v4@9.063,30.617 ; v4@8.883,31.05 cw(c8.45,30.617) v4@9.063,30.617 ; v4@8.883,31.05 cw(c8.45,30.617) v4@9.063,30.617 ; v4@8.883,31.05 cw(c8.45,30.617) v4@9.063,30.617 ; v4@9.063,30.617 cw(c9.676,30.617) v4@9.243,31.05 ; v4@9.063,30.617 cw(c9.676,30.617) v4@9.243,31.05 ; v4@9.063,30.617 cw(c9.676,30.617) v4@9.243,31.05 ; v4@9.063,30.617 cw(c9.676,30.617) v4@9.243,31.05 ; v4@9.063,30.617 cw(c9.676,30.617) v4@9.243,31.05 ; v4@9.063,30.954 ccw(c9.676,30.954) v4@9.243,30.521 ; v4@9.063,30.954 ccw(c9.676,30.954) v4@9.243,30.521 ; v4@9.063,30.954 ccw(c9.676,30.954) v4@9.243,30.521 ; v4@9.063,30.954 ccw(c9.676,30.954) v4@9.243,30.521 ; v4@9.063,30.954 ccw(c9.676,30.954) v4@9.243,30.521 ; v4@9.243,30.161 cw(c9.676,29.728) 9.676,30.341 ; v4@9.243,30.161 cw(c9.676,29.728) 9.676,30.341 ; v4@9.243,30.161 cw(c9.676,29.728) 9.676,30.341 ; v4@9.243,30.161 cw(c9.676,29.728) 9.676,30.341 ; v4@9.243,30.161 cw(c9.676,29.728) 9.676,30.341 ; v4@9.243,30.521 ccw(c9.676,30.954) 9.676,30.341 ; v4@9.243,30.521 ccw(c9.676,30.954) 9.676,30.341 ; v4@9.243,30.521 ccw(c9.676,30.954) 9.676,30.341 ; v4@9.243,30.521 ccw(c9.676,30.954) 9.676,30.341 ; v4@9.243,30.521 ccw(c9.676,30.954) 9.676,30.341 ; 20.313,45.02 ccw(c19.88,45.454) v1@20.493,45.454 ; 20.313,45.02 cw(c20.747,44.587) v1@20.747,45.2 ; 20.313,45.02 ccw(c19.88,45.454) v1@20.493,45.454 ; 20.313,45.02 cw(c20.747,44.587) v1@20.747,45.2 ; 20.313,45.02 ccw(c19.88,45.454) v1@20.493,45.454 ; 20.313,45.02 cw(c20.747,44.587) v1@20.747,45.2 ; 20.313,45.02 ccw(c19.88,45.454) v1@20.493,45.454 ; 20.313,45.02 cw(c20.747,44.587) v1@20.747,45.2 ; 20.313,45.02 ccw(c19.88,45.454) v1@20.493,45.454 ; 20.313,45.02 cw(c20.747,44.587) v1@20.747,45.2 ; v1@26.388,43.369 cw(c26.821,42.936) 26.821,43.549 ; v1@26.388,43.369 cw(c26.821,42.936) 26.821,43.549 ; v1@26.388,43.369 cw(c26.821,42.936) 26.821,43.549 ; v1@26.388,43.369 cw(c26.821,42.936) 26.821,43.549 ; v1@26.388,43.369 cw(c26.821,42.936) 26.821,43.549 ; v1@26.388,43.729 ccw(c26.821,44.162) 26.821,43.549 ; v1@26.388,43.729 ccw(c26.821,44.162) 26.821,43.549 ; v1@26.388,43.729 ccw(c26.821,44.162) 26.821,43.549 ; v1@26.388,43.729 ccw(c26.821,44.162) 26.821,43.549 ; v1@26.388,43.729 ccw(c26.821,44.162) 26.821,43.549 ; v1@47.72,18.32 cw(c47.287,17.887) 47.9,17.887 ; v1@47.72,18.32 cw(c47.287,17.887) 47.9,17.887 ; v1@47.72,18.32 cw(c47.287,17.887) 47.9,17.887 ; 47.9,17.887 cw(c48.513,17.887) v1@48.08,18.32 ; 47.9,17.887 cw(c48.513,17.887) v1@48.08,18.32 ; 47.9,17.887 cw(c48.513,17.887) v1@48.08,18.32 ; 47.966,20.434 ccw(c48.4,20.867) v1@48.4,20.254 ; 47.966,20.434 cw(c47.533,20) v1@48.146,20 ; 47.966,20.434 ccw(c48.4,20.867) v1@48.4,20.254 ; 47.966,20.434 cw(c47.533,20) v1@48.146,20 ; 47.966,20.434 ccw(c48.4,20.867) v1@48.4,20.254 ; 47.966,20.434 cw(c47.533,20) v1@48.146,20 ; v1@48.441,27.682 cw(c48.008,27.249) 48.621,27.249 ; v1@48.441,27.682 cw(c48.008,27.249) 48.621,27.249 ; v1@48.441,27.682 cw(c48.008,27.249) 48.621,27.249 ; v1@48.441,28.042 ccw(c48.008,28.475) 48.621,28.475 ; v1@48.441,28.042 ccw(c48.008,28.475) 48.621,28.475 ; v1@48.441,28.042 ccw(c48.008,28.475) 48.621,28.475 ; 48.621,27.249 cw(c49.234,27.249) v1@48.801,27.682 ; 48.621,27.249 cw(c49.234,27.249) v1@48.801,27.682 ; 48.621,27.249 cw(c49.234,27.249) v1@48.801,27.682 ; 48.621,28.475 ccw(c49.234,28.475) v1@48.801,28.042 ; 48.621,28.475 ccw(c49.234,28.475) v1@48.801,28.042 ; 48.621,28.475 ccw(c49.234,28.475) v1@48.801,28.042 ; 50.36,15.355 ccw(c50.36,15.968) v1@50.793,15.535 ; 50.36,15.355 cw(c50.36,14.742) v1@50.793,15.175 ; 50.36,15.355 ccw(c50.36,15.968) v1@50.793,15.535 ; 50.36,15.355 cw(c50.36,14.742) v1@50.793,15.175 ; 50.36,15.355 ccw(c50.36,15.968) v1@50.793,15.535 ; 50.36,15.355 cw(c50.36,14.742) v1@50.793,15.175 ; 50.36,15.355 ccw(c50.36,15.968) v1@50.793,15.535 ; 50.36,15.355 cw(c50.36,14.742) v1@50.793,15.175 ; 50.36,15.355 ccw(c50.36,15.968) v1@50.793,15.535 ; 50.36,15.355 cw(c50.36,14.742) v1@50.793,15.175 ; v4@53.205,46.671 cw(c52.772,46.238) 53.385,46.238 ; v4@53.205,46.671 cw(c52.772,46.238) 53.385,46.238 ; v4@53.205,46.671 cw(c52.772,46.238) 53.385,46.238 ; v4@53.205,46.671 cw(c52.772,46.238) 53.385,46.238 ; v4@53.205,46.671 cw(c52.772,46.238) 53.385,46.238 ; v4@53.205,47.031 ccw(c52.772,47.464) 53.385,47.464 ; v4@53.205,47.031 ccw(c52.772,47.464) 53.385,47.464 ; v4@53.205,47.031 ccw(c52.772,47.464) 53.385,47.464 ; v4@53.205,47.031 ccw(c52.772,47.464) 53.385,47.464 ; v4@53.205,47.031 ccw(c52.772,47.464) 53.385,47.464 ; 53.385,46.238 cw(c53.998,46.238) v4@53.565,46.671 ; 53.385,46.238 cw(c53.998,46.238) v4@53.565,46.671 ; 53.385,46.238 cw(c53.998,46.238) v4@53.565,46.671 ; 53.385,46.238 cw(c53.998,46.238) v4@53.565,46.671 ; 53.385,46.238 cw(c53.998,46.238) v4@53.565,46.671 ; 53.385,47.464 ccw(c53.998,47.464) v4@53.565,47.031 ; 53.385,47.464 ccw(c53.998,47.464) v4@53.565,47.031 ; 53.385,47.464 ccw(c53.998,47.464) v4@53.565,47.031 ; 53.385,47.464 ccw(c53.998,47.464) v4@53.565,47.031 ; 53.385,47.464 ccw(c53.998,47.464) v4@53.565,47.031 ; 57.472,31.23 ccw(c57.472,31.843) v6@57.905,31.41 ; 57.472,31.23 cw(c57.472,30.617) v6@57.905,31.05 ; 57.472,31.23 ccw(c57.472,31.843) v6@57.905,31.41 ; 57.472,31.23 cw(c57.472,30.617) v6@57.905,31.05 ; 57.472,31.23 ccw(c57.472,31.843) v6@57.905,31.41 ; 57.472,31.23 cw(c57.472,30.617) v6@57.905,31.05 ; 57.472,31.23 ccw(c57.472,31.843) v6@57.905,31.41 ; 57.472,31.23 cw(c57.472,30.617) v6@57.905,31.05 ; 57.472,31.23 ccw(c57.472,31.843) v6@57.905,31.41 ; 57.472,31.23 cw(c57.472,30.617) v6@57.905,31.05
  Top Layer w0.4: C51.1@22.353,13.704 20.126,13.704 18.336,15.494 14.917,15.494 14.526,15.103 14.526,13.321 15.921,11.926 17.826,11.926 18.715,11.037 23.414,11.037 24.164,11.787 24.164,14.351 U2.9@24.134,14.381 ; C4.2@36.356,7.874 36.826,7.874 37.892,6.808 v1(37.9,5.7) ; v1@37.719,6.8 ccw(c37.282,6.8) 37.591,7.109 ccw(c37.9,7.418) v1@37.9,6.981 ; v1@37.771,5.827 ccw(c37.46,6.134) 37.897,6.137 ccw(c38.334,6.14) v1@38.027,5.829 ; 18.137,11.615 ccw(c19.096,12.575) v4@19.096,11.218 ; 18.137,11.615 ccw(c19.096,12.575) v4@19.096,11.218 ; 18.137,11.615 ccw(c19.096,12.575) v4@19.096,11.218 ; 18.137,11.615 ccw(c19.096,12.575) v4@19.096,11.218 ; 18.137,11.615 ccw(c19.096,12.575) v4@19.096,11.218 ; v4@19.224,10.909 cw(c19.533,10.6) 19.533,11.037 ; v4@19.224,10.909 cw(c19.533,10.6) 19.533,11.037 ; v4@19.224,10.909 cw(c19.533,10.6) 19.533,11.037 ; v4@19.224,10.909 cw(c19.533,10.6) 19.533,11.037 ; v4@19.224,10.909 cw(c19.533,10.6) 19.533,11.037 ; v4@19.224,11.165 ccw(c19.533,11.474) 19.533,11.037 ; v4@19.224,11.165 ccw(c19.533,11.474) 19.533,11.037 ; v4@19.224,11.165 ccw(c19.533,11.474) 19.533,11.037 ; v4@19.224,11.165 ccw(c19.533,11.474) 19.533,11.037 ; v4@19.224,11.165 ccw(c19.533,11.474) 19.533,11.037 ; 19.675,11.037 ccw(c19.675,11.474) v4@19.984,11.165 ; 19.675,11.037 cw(c19.675,10.6) v4@19.984,10.909 ; 19.675,11.037 ccw(c19.675,11.474) v4@19.984,11.165 ; 19.675,11.037 cw(c19.675,10.6) v4@19.984,10.909 ; 19.675,11.037 ccw(c19.675,11.474) v4@19.984,11.165 ; 19.675,11.037 cw(c19.675,10.6) v4@19.984,10.909 ; 19.675,11.037 ccw(c19.675,11.474) v4@19.984,11.165 ; 19.675,11.037 cw(c19.675,10.6) v4@19.984,10.909 ; 19.675,11.037 ccw(c19.675,11.474) v4@19.984,11.165 ; 19.675,11.037 cw(c19.675,10.6) v4@19.984,10.909 ; v4@20.24,10.909 cw(c20.549,10.6) 20.549,11.037 ; v4@20.24,10.909 cw(c20.549,10.6) 20.549,11.037 ; v4@20.24,10.909 cw(c20.549,10.6) 20.549,11.037 ; v4@20.24,10.909 cw(c20.549,10.6) 20.549,11.037 ; v4@20.24,10.909 cw(c20.549,10.6) 20.549,11.037 ; v4@20.24,11.165 ccw(c20.549,11.474) 20.549,11.037 ; v4@20.24,11.165 ccw(c20.549,11.474) 20.549,11.037 ; v4@20.24,11.165 ccw(c20.549,11.474) 20.549,11.037 ; v4@20.24,11.165 ccw(c20.549,11.474) 20.549,11.037 ; v4@20.24,11.165 ccw(c20.549,11.474) 20.549,11.037 ; 20.691,11.037 ccw(c20.691,11.474) v4@21,11.165 ; 20.691,11.037 cw(c20.691,10.6) v4@21,10.909 ; 20.691,11.037 ccw(c20.691,11.474) v4@21,11.165 ; 20.691,11.037 cw(c20.691,10.6) v4@21,10.909 ; 20.691,11.037 ccw(c20.691,11.474) v4@21,11.165 ; 20.691,11.037 cw(c20.691,10.6) v4@21,10.909 ; 20.691,11.037 ccw(c20.691,11.474) v4@21,11.165 ; 20.691,11.037 cw(c20.691,10.6) v4@21,10.909 ; 20.691,11.037 ccw(c20.691,11.474) v4@21,11.165 ; 20.691,11.037 cw(c20.691,10.6) v4@21,10.909 ; v4@21.256,10.909 cw(c21.565,10.6) 21.565,11.037 ; v4@21.256,10.909 cw(c21.565,10.6) 21.565,11.037 ; v4@21.256,10.909 cw(c21.565,10.6) 21.565,11.037 ; v4@21.256,10.909 cw(c21.565,10.6) 21.565,11.037 ; v4@21.256,10.909 cw(c21.565,10.6) 21.565,11.037 ; v4@21.256,11.165 ccw(c21.565,11.474) 21.565,11.037 ; v4@21.256,11.165 ccw(c21.565,11.474) 21.565,11.037 ; v4@21.256,11.165 ccw(c21.565,11.474) 21.565,11.037 ; v4@21.256,11.165 ccw(c21.565,11.474) 21.565,11.037 ; v4@21.256,11.165 ccw(c21.565,11.474) 21.565,11.037
  Top Layer w0.8: Q11.4@80.5,20.8 80.5,32.9 80.962,33.362 C1.2@82.296,33.362 ; 80.576,24.024 C10.2@82.746,24.024
  Top Layer w2: C2.2@71.01,15.99 78.09,15.99 Q11.4@81.5,19.4 ; C2.2@71.097,14.847 78.547,14.847 Q11.4@82.3,18.6
  Top Layer w2.3: 69.885,42.26 69.885,55.106
  Top Layer w2.4: v2(65.77,25.4) 65.77,21.23 C2.2@71.01,15.99
  Bottom Layer w0.254: Q30.4@10.484,2.098 10.484,1.616 10.68,1.42 21.02,1.42 21.2,1.6 21.2,3.1 20.302,3.998 Q29.1@19.088,3.998 ; Q30.1@12.484,3.998 13.402,3.998 14.1,3.3 14.1,1.42 ; 17.088,1.42 Q29.4@17.088,2.098 ; v1@21.02,2.22 cw(c20.587,1.787) 21.2,1.787 cw(c21.813,1.787) 21.38,2.22 cw(c21.813,1.787) 21.813,2.4 cw(c21.813,3.013) 21.38,2.58 cw(c21.813,3.013) 21.2,3.013 cw(c20.587,3.013) v1@21.02,2.58 ; v1(21.2,2.4) R84.2@22.5,2.4 ; R81.2@28.956,3.23 R80.2@31.496,3.23 ; v1@30.02,2.08 ccw(c29.587,2.513) 30.2,2.513 ccw(c30.813,2.513) v1@30.38,2.08 ; v1(30.2,1.9) 30.2,3.23 ; R77.2@41.148,2.098 46.798,2.098 47.3,2.6 v1(47.3,3.9) ; v1@47.12,3.72 cw(c46.687,3.287) 47.3,3.287 cw(c47.913,3.287) v1@47.48,3.72
  Bottom Layer w0.4: R74.2@10.333,9.96 10.56,9.96 11.5,10.9 11.5,11.4 11.9,11.8 15.8,11.8 16.563,11.037 v4(21.128,11.037) ; C94.1@14.9,54.9 18.6,58.6 C93.2@22.1,58.6 ; v4@18.968,10.909 ccw(c18.659,10.6) 18.659,11.037 ccw(c18.659,11.474) v4@18.968,11.165 ; v4@19.224,10.909 cw(c19.533,10.6) 19.533,11.037 cw(c19.533,11.474) v4@19.224,11.165 ; v4@19.984,10.909 ccw(c19.675,10.6) 19.675,11.037 ccw(c19.675,11.474) v4@19.984,11.165 ; v4@20.24,10.909 cw(c20.549,10.6) 20.549,11.037 cw(c20.549,11.474) v4@20.24,11.165 ; v4@21,10.909 ccw(c20.691,10.6) 20.691,11.037 ccw(c20.691,11.474) v4@21,11.165
  Bottom Layer w0.8: R74.2@10.333,9.96 R74.2@10.686,9.96
  Bottom Layer w1.2: v3(48.695,59.931) v3(54.895,59.931) ; v3(68.995,59.931) v3(70.495,59.931)
  Bottom Layer w1.6: v5(65.77,21.5) v2(65.77,25.4)
  Bottom Layer w2: v3(25.9,58.6) C7.2@31.5,58.6 ; v2(65.77,25.4) v2(68.77,25.4)
  other v1: 37.9,6.8 48.621,27.862 20.4,58.6 21.2,58.6
  other v3: 75.7,45.8 64.295,46.231 66.195,46.231 67.895,46.231 71.895,46.231 62.5,46.6 61.095,47.231 27.4,58.6 28.9,58.6 50.195,59.931 53.395,59.931
  other v4: 19.096,11.037 20.112,11.037 53.385,46.851
  other v5: 74,16.3 75.6,16.3 65.77,23.3
HC1drive: Q3.1 Q15.3 R7.1 | length 50.3
  Top Layer w0.254: Q15.3@42.672,40.3 51,40.3 51.7,39.6 51.7,36 53.1,34.6 72.3,34.6 72.6,34.9 v6(73.7,34.9) ; 46.72,40.3 R7.1@46.72,42.738 ; 73.087,34.9 ccw(c73.087,35.513) v6@73.52,35.08 ; 73.087,34.9 cw(c73.087,34.287) v6@73.52,34.72 ; 73.087,34.9 ccw(c73.087,35.513) v6@73.52,35.08 ; 73.087,34.9 cw(c73.087,34.287) v6@73.52,34.72 ; 73.087,34.9 ccw(c73.087,35.513) v6@73.52,35.08 ; 73.087,34.9 cw(c73.087,34.287) v6@73.52,34.72
  Bottom Layer w0.254: Q3.1@72.103,40.733 72.103,39.397 73.7,37.8 v6(73.7,34.9) ; v6@73.52,35.08 ccw(c73.087,35.513) 73.7,35.513 ; v6@73.52,35.08 ccw(c73.087,35.513) 73.7,35.513 ; v6@73.52,35.08 ccw(c73.087,35.513) 73.7,35.513 ; 73.7,35.513 ccw(c74.313,35.513) v6@73.88,35.08 ; 73.7,35.513 ccw(c74.313,35.513) v6@73.88,35.08 ; 73.7,35.513 ccw(c74.313,35.513) v6@73.88,35.08
HC1feedback: C19.1 Q3.2 R18.1 R18.2 R63.1 U1.97 | length 86
  Top Layer w0.254: U1.97@25.247,37.294 25.247,36.128 27.002,34.373 30.304,34.373 31.796,32.881 35.257,32.881 36.273,31.865 37.953,31.865 R18.1@39.035,30.783 ; v1(36.1,22.3) 37.119,22.3 ; R63.1@37.119,19.673 37.119,22.919 39.035,24.835 C19.1@39.035,24.759 ; C19.1@39.035,24.919 39.709,24.919 39.924,25.134 39.924,28.055 R18.2@39.289,28.69 ; v1@36.28,22.12 cw(c36.713,21.687) 36.713,22.3 ; v1@36.28,22.12 cw(c36.713,21.687) 36.713,22.3 ; v1@36.28,22.12 cw(c36.713,21.687) 36.713,22.3 ; v1@36.28,22.48 ccw(c36.713,22.913) 36.713,22.3 ; v1@36.28,22.48 ccw(c36.713,22.913) 36.713,22.3 ; v1@36.28,22.48 ccw(c36.713,22.913) 36.713,22.3
  Bottom Layer w0.254: v1(36.1,22.3) 36.114,25.896 37.003,26.785 39.924,26.785 40.686,26.023 48.052,26.023 49.322,27.293 59.393,27.293 59.8,27.7 59.8,33.8 60.659,34.659 69.459,34.659 70.403,35.603 Q3.2@70.403,40.733 ; v1@35.921,22.48 ccw(c35.489,22.916) 36.102,22.913 ; v1@35.921,22.48 ccw(c35.489,22.916) 36.102,22.913 ; v1@35.921,22.48 ccw(c35.489,22.916) 36.102,22.913 ; 36.102,22.913 ccw(c36.716,22.911) v1@36.28,22.479 ; 36.102,22.913 ccw(c36.716,22.911) v1@36.28,22.479 ; 36.102,22.913 ccw(c36.716,22.911) v1@36.28,22.479
HC2drive: Q2.1 Q12.3 R1.1 | length 35.4
  Top Layer w0.254: R1.1@42.672,48.702 44.102,48.702 45.1,49.7 48.5,49.7 48.8,49.4 48.8,45.3 50.17,43.93 52.624,43.93 53.64,42.914 v1(53.64,42.152) ; v1@53.46,42.332 ccw(c53.027,42.765) 53.64,42.765 ; v1@53.46,42.332 ccw(c53.027,42.765) 53.64,42.765 ; v1@53.46,42.332 ccw(c53.027,42.765) 53.64,42.765 ; v1@53.46,42.332 ccw(c53.027,42.765) 53.64,42.765 ; v1@53.46,42.332 ccw(c53.027,42.765) 53.64,42.765 ; 53.64,42.765 ccw(c54.253,42.765) v1@53.82,42.332 ; 53.64,42.765 ccw(c54.253,42.765) v1@53.82,42.332 ; 53.64,42.765 ccw(c54.253,42.765) v1@53.82,42.332 ; 53.64,42.765 ccw(c54.253,42.765) v1@53.82,42.332 ; 53.64,42.765 ccw(c54.253,42.765) v1@53.82,42.332
  Bottom Layer w0.254: v1(53.64,42.152) 53.64,45.073 56.228,47.661 Q2.1@58.107,47.661 ; v1@53.46,42.332 ccw(c53.027,42.765) 53.64,42.765 ; v1@53.46,42.332 ccw(c53.027,42.765) 53.64,42.765 ; v1@53.46,42.332 ccw(c53.027,42.765) 53.64,42.765 ; v1@53.46,42.332 ccw(c53.027,42.765) 53.64,42.765 ; v1@53.46,42.332 ccw(c53.027,42.765) 53.64,42.765 ; 53.64,42.765 ccw(c54.253,42.765) v1@53.82,42.332 ; 53.64,42.765 ccw(c54.253,42.765) v1@53.82,42.332 ; 53.64,42.765 ccw(c54.253,42.765) v1@53.82,42.332 ; 53.64,42.765 ccw(c54.253,42.765) v1@53.82,42.332 ; 53.64,42.765 ccw(c54.253,42.765) v1@53.82,42.332
HC2feedback: C14.1 Q2.2 R21.1 R21.2 R56.1 U1.90 | length 107.2
  Top Layer w0.254: R21.1@21.747,31.291 U1.90@21.747,37.294 ; R21.2@21.763,29.391 21.763,28.563 20.874,27.674 20.874,25.642 21.811,24.705 21.811,24.07 21.89,23.991 24.279,23.991 24.72,23.55 24.72,21.487 23.287,20.054 R56.1@23.287,19.419 ; v1@24.54,22.02 cw(c24.107,21.587) 24.72,21.587 ; v1@24.54,22.02 cw(c24.107,21.587) 24.72,21.587 ; v1@24.54,22.02 cw(c24.107,21.587) 24.72,21.587 ; v1@24.54,22.02 cw(c24.107,21.587) 24.72,21.587 ; v1@24.54,22.02 cw(c24.107,21.587) 24.72,21.587 ; v1@24.54,22.38 ccw(c24.107,22.813) 24.72,22.813 ; v1@24.54,22.38 ccw(c24.107,22.813) 24.72,22.813 ; v1@24.54,22.38 ccw(c24.107,22.813) 24.72,22.813 ; v1@24.54,22.38 ccw(c24.107,22.813) 24.72,22.813 ; v1@24.54,22.38 ccw(c24.107,22.813) 24.72,22.813 ; 24.72,21.587 cw(c25.333,21.587) v1@24.9,22.02 ; 24.72,21.587 cw(c25.333,21.587) v1@24.9,22.02 ; 24.72,21.587 cw(c25.333,21.587) v1@24.9,22.02 ; 24.72,21.587 cw(c25.333,21.587) v1@24.9,22.02 ; 24.72,21.587 cw(c25.333,21.587) v1@24.9,22.02 ; 24.72,22.813 ccw(c25.333,22.813) v1@24.9,22.38 ; 24.72,22.813 ccw(c25.333,22.813) v1@24.9,22.38 ; 24.72,22.813 ccw(c25.333,22.813) v1@24.9,22.38 ; 24.72,22.813 ccw(c25.333,22.813) v1@24.9,22.38 ; 24.72,22.813 ccw(c25.333,22.813) v1@24.9,22.38
  MidLayer1 w0.254: v1(24.72,22.2) 24.72,24.7 25.27,25.25 25.27,31.689 25.573,31.992 28.367,31.992 29.51,33.135 29.51,35.929 30.526,36.945 v1(30.526,37.707) ; v1@24.54,22.38 ccw(c24.107,22.813) 24.72,22.813 ; v1@24.54,22.38 ccw(c24.107,22.813) 24.72,22.813 ; v1@24.54,22.38 ccw(c24.107,22.813) 24.72,22.813 ; v1@24.54,22.38 ccw(c24.107,22.813) 24.72,22.813 ; v1@24.54,22.38 ccw(c24.107,22.813) 24.72,22.813 ; 24.72,22.813 ccw(c25.333,22.813) v1@24.9,22.38 ; 24.72,22.813 ccw(c25.333,22.813) v1@24.9,22.38 ; 24.72,22.813 ccw(c25.333,22.813) v1@24.9,22.38 ; 24.72,22.813 ccw(c25.333,22.813) v1@24.9,22.38 ; 24.72,22.813 ccw(c25.333,22.813) v1@24.9,22.38 ; v1@30.346,37.527 cw(c29.913,37.094) 30.526,37.094 ; v1@30.346,37.527 cw(c29.913,37.094) 30.526,37.094 ; v1@30.346,37.527 cw(c29.913,37.094) 30.526,37.094 ; v1@30.346,37.527 cw(c29.913,37.094) 30.526,37.094 ; v1@30.346,37.527 cw(c29.913,37.094) 30.526,37.094 ; 30.526,37.094 cw(c31.139,37.094) v1@30.706,37.527 ; 30.526,37.094 cw(c31.139,37.094) v1@30.706,37.527 ; 30.526,37.094 cw(c31.139,37.094) v1@30.706,37.527 ; 30.526,37.094 cw(c31.139,37.094) v1@30.706,37.527 ; 30.526,37.094 cw(c31.139,37.094) v1@30.706,37.527
  Bottom Layer w0.254: v1(30.526,37.707) 30.526,38.596 30.145,38.977 30.145,42.025 30.653,42.533 34.717,42.533 35.225,42.025 35.225,39.103 37.256,37.072 52.116,37.072 54.783,39.739 54.783,45.454 55.29,45.961 Q2.2@58.107,45.961 ; v1@30.346,37.887 ccw(c29.913,38.32) 30.526,38.32 ; v1@30.346,37.887 ccw(c29.913,38.32) 30.526,38.32 ; v1@30.346,37.887 ccw(c29.913,38.32) 30.526,38.32 ; v1@30.346,37.887 ccw(c29.913,38.32) 30.526,38.32 ; v1@30.346,37.887 ccw(c29.913,38.32) 30.526,38.32 ; 30.526,38.32 ccw(c31.139,38.32) v1@30.706,37.887 ; 30.526,38.32 ccw(c31.139,38.32) v1@30.706,37.887 ; 30.526,38.32 ccw(c31.139,38.32) v1@30.706,37.887 ; 30.526,38.32 ccw(c31.139,38.32) v1@30.706,37.887 ; 30.526,38.32 ccw(c31.139,38.32) v1@30.706,37.887
HC3drive: Q1.1 Q14.3 R8.2 | length 48.7
  Top Layer w0.254: R8.2@42.5,53.7 49.2,53.7 50.338,52.562 50.338,46.089 51.1,45.327 v1(52.878,45.327) ; 52.265,45.327 ccw(c52.265,45.94) v1@52.698,45.507 ; 52.265,45.327 cw(c52.265,44.714) v1@52.698,45.147 ; 52.265,45.327 ccw(c52.265,45.94) v1@52.698,45.507 ; 52.265,45.327 cw(c52.265,44.714) v1@52.698,45.147 ; 52.265,45.327 ccw(c52.265,45.94) v1@52.698,45.507 ; 52.265,45.327 cw(c52.265,44.714) v1@52.698,45.147 ; 52.265,45.327 ccw(c52.265,45.94) v1@52.698,45.507 ; 52.265,45.327 cw(c52.265,44.714) v1@52.698,45.147 ; 52.265,45.327 ccw(c52.265,45.94) v1@52.698,45.507 ; 52.265,45.327 cw(c52.265,44.714) v1@52.698,45.147
  Bottom Layer w0.254: Q1.1@39.162,38.977 40.178,38.977 41.57,37.585 51.867,37.585 52.624,38.342 52.624,42.66 52.878,42.914 v1(52.878,45.327) ; v1@52.698,45.147 cw(c52.265,44.714) 52.878,44.714 ; v1@52.698,45.147 cw(c52.265,44.714) 52.878,44.714 ; v1@52.698,45.147 cw(c52.265,44.714) 52.878,44.714 ; v1@52.698,45.147 cw(c52.265,44.714) 52.878,44.714 ; v1@52.698,45.147 cw(c52.265,44.714) 52.878,44.714 ; 52.878,44.714 cw(c53.491,44.714) v1@53.058,45.147 ; 52.878,44.714 cw(c53.491,44.714) v1@53.058,45.147 ; 52.878,44.714 cw(c53.491,44.714) v1@53.058,45.147 ; 52.878,44.714 cw(c53.491,44.714) v1@53.058,45.147 ; 52.878,44.714 cw(c53.491,44.714) v1@53.058,45.147
HC3feedback: C13.1 Q1.2 R22.1 R22.2 R55.1 U1.89 | length 82.9
  Top Layer w0.254: R22.1@19.731,31.291 20.173,31.291 21.247,32.365 U1.89@21.247,37.294 ; R22.2@20.112,29.071 20.112,25.642 19.311,24.841 19.311,23.776 19.604,23.483 23.237,23.483 23.67,23.05 23.67,21.15 23.209,20.689 21.829,20.689 R55.1@20.747,19.607 ; v1@23.49,22.02 cw(c23.057,21.587) 23.67,21.587 ; v1@23.49,22.02 cw(c23.057,21.587) 23.67,21.587 ; v1@23.49,22.02 cw(c23.057,21.587) 23.67,21.587 ; v1@23.49,22.02 cw(c23.057,21.587) 23.67,21.587 ; v1@23.49,22.02 cw(c23.057,21.587) 23.67,21.587 ; v1@23.49,22.38 ccw(c23.057,22.813) 23.67,22.813 ; v1@23.49,22.38 ccw(c23.057,22.813) 23.67,22.813 ; v1@23.49,22.38 ccw(c23.057,22.813) 23.67,22.813 ; v1@23.49,22.38 ccw(c23.057,22.813) 23.67,22.813 ; v1@23.49,22.38 ccw(c23.057,22.813) 23.67,22.813 ; 23.67,21.587 cw(c24.283,21.587) v1@23.85,22.02 ; 23.67,21.587 cw(c24.283,21.587) v1@23.85,22.02 ; 23.67,21.587 cw(c24.283,21.587) v1@23.85,22.02 ; 23.67,21.587 cw(c24.283,21.587) v1@23.85,22.02 ; 23.67,21.587 cw(c24.283,21.587) v1@23.85,22.02 ; 23.67,22.813 ccw(c24.283,22.813) v1@23.85,22.38 ; 23.67,22.813 ccw(c24.283,22.813) v1@23.85,22.38 ; 23.67,22.813 ccw(c24.283,22.813) v1@23.85,22.38 ; 23.67,22.813 ccw(c24.283,22.813) v1@23.85,22.38 ; 23.67,22.813 ccw(c24.283,22.813) v1@23.85,22.38
  MidLayer1 w0.254: v1(23.67,22.2) 23.67,24.366 24.811,25.507 24.811,31.948 25.363,32.5 28.157,32.5 29.002,33.345 29.002,36.183 29.51,36.691 v1(29.51,37.453) ; v1@23.49,22.38 ccw(c23.057,22.813) 23.67,22.813 ; v1@23.49,22.38 ccw(c23.057,22.813) 23.67,22.813 ; v1@23.49,22.38 ccw(c23.057,22.813) 23.67,22.813 ; v1@23.49,22.38 ccw(c23.057,22.813) 23.67,22.813 ; v1@23.49,22.38 ccw(c23.057,22.813) 23.67,22.813 ; 23.67,22.813 ccw(c24.283,22.813) v1@23.85,22.38 ; 23.67,22.813 ccw(c24.283,22.813) v1@23.85,22.38 ; 23.67,22.813 ccw(c24.283,22.813) v1@23.85,22.38 ; 23.67,22.813 ccw(c24.283,22.813) v1@23.85,22.38 ; 23.67,22.813 ccw(c24.283,22.813) v1@23.85,22.38 ; v1@29.33,37.273 cw(c28.897,36.84) 29.51,36.84 ; v1@29.33,37.273 cw(c28.897,36.84) 29.51,36.84 ; v1@29.33,37.273 cw(c28.897,36.84) 29.51,36.84 ; v1@29.33,37.273 cw(c28.897,36.84) 29.51,36.84 ; v1@29.33,37.273 cw(c28.897,36.84) 29.51,36.84 ; 29.51,36.84 cw(c30.123,36.84) v1@29.69,37.273 ; 29.51,36.84 cw(c30.123,36.84) v1@29.69,37.273 ; 29.51,36.84 cw(c30.123,36.84) v1@29.69,37.273 ; 29.51,36.84 cw(c30.123,36.84) v1@29.69,37.273 ; 29.51,36.84 cw(c30.123,36.84) v1@29.69,37.273
  Bottom Layer w0.254: v1(29.51,37.453) 29.51,42.152 30.399,43.041 36.749,43.041 37.383,42.407 Q1.2@37.383,38.701 ; v1@29.33,37.633 ccw(c28.897,38.066) 29.51,38.066 ; v1@29.33,37.633 ccw(c28.897,38.066) 29.51,38.066 ; v1@29.33,37.633 ccw(c28.897,38.066) 29.51,38.066 ; v1@29.33,37.633 ccw(c28.897,38.066) 29.51,38.066 ; v1@29.33,37.633 ccw(c28.897,38.066) 29.51,38.066 ; 29.51,38.066 ccw(c30.123,38.066) v1@29.69,37.633 ; 29.51,38.066 ccw(c30.123,38.066) v1@29.69,37.633 ; 29.51,38.066 ccw(c30.123,38.066) v1@29.69,37.633 ; 29.51,38.066 ccw(c30.123,38.066) v1@29.69,37.633 ; 29.51,38.066 ccw(c30.123,38.066) v1@29.69,37.633
HC4drive: Q4.1 Q18.3 R9.2 | length 74.2
  Top Layer w0.254: R9.2@43.18,59.37 46.43,59.37 47.7,58.1 50.392,58.1 54.148,54.344 v4(54.148,47.867) ; v4@53.968,48.047 ccw(c53.535,48.48) 54.148,48.48 ; v4@53.968,48.047 ccw(c53.535,48.48) 54.148,48.48 ; v4@53.968,48.047 ccw(c53.535,48.48) 54.148,48.48 ; v4@53.968,48.047 ccw(c53.535,48.48) 54.148,48.48 ; v4@53.968,48.047 ccw(c53.535,48.48) 54.148,48.48 ; 54.148,48.48 ccw(c54.761,48.48) v4@54.328,48.047 ; 54.148,48.48 ccw(c54.761,48.48) v4@54.328,48.047 ; 54.148,48.48 ccw(c54.761,48.48) v4@54.328,48.047 ; 54.148,48.48 ccw(c54.761,48.48) v4@54.328,48.047 ; 54.148,48.48 ccw(c54.761,48.48) v4@54.328,48.047
  Bottom Layer w0.254: Q4.1@25.875,38.701 25.875,41.7 27.724,43.549 39.251,43.549 40.686,42.114 40.686,39.485 42.083,38.088 51.712,38.088 52.116,38.492 52.116,45.708 52.497,46.089 53.894,46.089 54.148,46.343 v4(54.148,47.867) ; v4@53.968,47.687 cw(c53.535,47.254) 54.148,47.254 ; v4@53.968,47.687 cw(c53.535,47.254) 54.148,47.254 ; v4@53.968,47.687 cw(c53.535,47.254) 54.148,47.254 ; v4@53.968,47.687 cw(c53.535,47.254) 54.148,47.254 ; v4@53.968,47.687 cw(c53.535,47.254) 54.148,47.254 ; 54.148,47.254 cw(c54.761,47.254) v4@54.328,47.687 ; 54.148,47.254 cw(c54.761,47.254) v4@54.328,47.687 ; 54.148,47.254 cw(c54.761,47.254) v4@54.328,47.687 ; 54.148,47.254 cw(c54.761,47.254) v4@54.328,47.687 ; 54.148,47.254 cw(c54.761,47.254) v4@54.328,47.687